# Altium PCB PCB1.PcbDoc (part 3 of 3)
Units mm, origin at the board's own origin, x right, y up, seen from the top; angles counter-clockwise.
Board outline 15.82 x 56.9 mm, 4 copper layers (Top Layer, Layer 1, Layer 2, Bottom Layer), stack 0.576 mm thick; 45 components, 31 nets, 148 pads, 202 vias.
Unrouted connection lines stored in the file: 3.
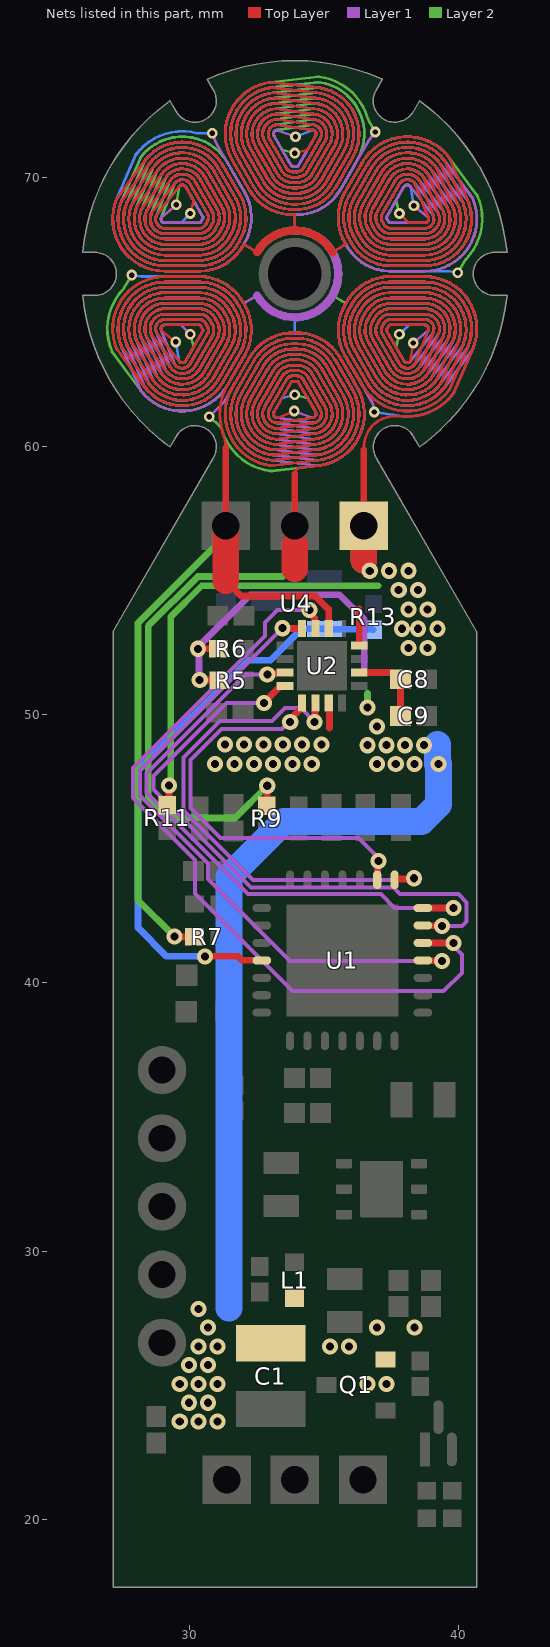
[diagram p5: the nets of this part, all layers, seen from the top]

## Via types
v1: diameter 0.6, hole 0.3, Top Layer to Bottom Layer, tented both sides, 160 vias
v2: diameter 0.5, hole 0.2, Top Layer to Bottom Layer, tented bottom, 20 vias
v3: diameter 0.4, hole 0.2, Top Layer to Bottom Layer, tented both sides, 18 vias
v4: diameter 0.5, hole 0.3, Top Layer to Bottom Layer, tented bottom, 4 vias

## Nets (pads, with @x,y where several pads share a name; then routed paths per layer and width w, separated by ;. In a path a pad name is that pad's centre, name@x,y a point inside that pad or via, vN(x,y) a via of type N, cw(c..) or ccw(c..) an arc to the next point about the centre after c; other vN are vias at no path point) (continued)
NetR7_2: (continued)
  Layer 2 w0.1: 27.093,63.528 27.106,63.509 ; 27.122,63.476 cw(c29.07,64.375) 27.106,63.509 ; v3(27.833,66.376) 27.541,65.881 ccw(c29.07,64.375) 27.106,63.509 ; v3(29.495,68.998) 29.599,69.674 ; 29.603,69.679 cw(c29.718,69.589) 29.844,69.662 30.482,68.556 cw(c30.419,68.52) 30.482,68.483 ; v3(30.012,64.171) 30.14,63.693 29.844,63.18 cw(c29.718,63.253) 29.603,63.163 29.595,63.174 28.757,64.228 cw(c29.07,64.375) 29.07,64.721 30.346,64.721 cw(c30.346,64.448) 30.578,64.592 cw(c30.346,64.448) 30.591,64.568 ; 30.41,68.358 cw(c30.346,68.394) 30.346,68.321 29.07,68.321 cw(c29.07,68.467) 28.934,68.521 28.939,68.534 29.434,69.786 cw(c29.718,69.589) 30.017,69.762 30.655,68.656 cw(c30.419,68.52) 30.66,68.392 ; 30.413,68.365 cw(c30.346,68.394) 30.41,68.359 30.445,68.421 30.482,68.483 ; 30.477,68.476 ccw(c30.419,68.52) 30.482,68.483 ; 30.578,64.592 ccw(c33.909,66.421) 30.618,64.521 ccw(c33.909,66.421) 30.66,64.45 ; 30.591,68.274 cw(c30.346,68.394) 30.578,68.25 ; 30.645,64.474 cw(c30.419,64.322) 30.66,64.45 ; 30.645,68.368 ccw(c30.419,68.52) 30.66,68.392 ; v3@30.704,61.061 cw(c30.184,59.969) 31.193,60.636 ccw(c33.261,61.207) 33.029,59.074 ; 30.751,64.693 ccw(c33.909,66.421) 30.791,64.621 ccw(c33.909,66.421) 30.833,64.55 ; 30.768,64.661 ccw(c30.346,64.448) 30.751,64.693 ccw(c30.346,64.448) 30.346,64.921 29.113,64.921 ccw(c29.07,64.375) 28.583,64.123 29.434,63.056 ccw(c29.718,63.253) 30.017,63.08 30.655,64.186 ccw(c30.419,64.322) 30.66,64.45 ; 30.768,68.181 cw(c30.346,68.394) 30.751,68.149 ; 30.815,64.581 cw(c30.419,64.322) 30.833,64.55 ; 30.815,68.261 ccw(c30.419,68.52) 30.833,68.292 ; 30.945,64.756 ccw(c30.346,64.448) 30.925,64.792 ; 30.945,68.086 cw(c30.346,68.394) 30.925,68.05 ; 30.985,64.686 cw(c30.419,64.322) 31.006,64.651 cw(c30.419,64.322) 31.002,63.986 30.364,62.88 cw(c29.718,63.253) 29.095,62.842 28.224,63.952 cw(c29.07,64.375) 29.063,65.321 30.346,65.321 cw(c30.346,64.448) 31.121,64.851 ; 30.985,68.156 ccw(c30.419,68.52) 31.006,68.191 ; 31.006,64.651 cw(c33.909,66.421) 30.965,64.721 cw(c33.909,66.421) 30.925,64.792 ; 31.099,64.891 ccw(c33.909,66.421) 31.138,64.821 ccw(c33.909,66.421) 31.179,64.752 ; 31.099,67.951 cw(c33.909,66.421) 31.138,68.021 cw(c33.909,66.421) 31.179,68.09 ; 31.121,67.991 cw(c30.346,68.394) 30.346,67.521 29.063,67.521 cw(c29.07,68.467) 28.224,68.89 28.761,70.219 cw(c29.718,69.589) 30.71,70.162 31.348,69.056 cw(c30.419,68.52) 31.351,67.988 ; 31.155,64.791 cw(c30.419,64.322) 31.175,63.886 30.533,62.774 cw(c29.718,63.253) 28.928,62.732 28.045,63.862 cw(c29.07,64.375) 29.07,65.521 30.346,65.521 cw(c30.346,64.448) 31.273,64.989 ; 31.155,68.051 ccw(c30.419,68.52) 31.175,68.956 30.533,70.068 ccw(c29.718,69.589) 28.928,70.11 28.403,68.801 ccw(c29.07,68.467) 29.07,67.721 30.346,67.721 ccw(c30.346,68.394) 30.925,68.05 ; 32.044,65.254 cw(c33.909,66.421) 32.004,65.321 ; 32.463,67.256 32.004,67.521 ccw(c30.419,68.52) 32.06,69.424 31.823,69.834 31.403,70.562 ccw(c29.718,69.589) 28.16,70.756 27.466,69.156 ccw(c29.07,68.467) 29.07,66.721 30.389,66.721 ccw(c30.346,68.394) 31.831,67.621 ccw(c30.419,68.52) 31.889,69.319 31.23,70.462 ccw(c29.718,69.589) 28.319,70.634 27.659,69.098 ccw(c29.07,68.467) 29.07,66.921 30.394,66.921 ccw(c30.346,68.394) 31.612,67.64 ; 33.006,59.071 33.029,59.074 ; 33.055,73.369 ccw(c33.261,71.635) 31.749,70.762 32.409,69.619 ccw(c33.836,70.493) 33.909,68.821 ccw(c33.982,70.493) 35.409,69.619 36.069,70.762 ccw(c34.557,71.635) 34.762,73.369 33.102,73.172 ccw(c33.261,71.635) 31.923,70.862 32.584,69.715 ccw(c33.836,70.493) 33.816,69.019 ; 33.056,59.077 34.789,59.275 ; 33.056,73.369 34.789,73.567 cw(c34.557,71.635) 36.242,70.662 35.822,69.934 35.585,69.524 cw(c33.982,70.493) 33.909,68.621 ; 33.066,59.07 cw(c33.261,61.207) 33.029,59.074 ; 33.829,63.222 ccw(c33.909,66.421) 33.909,63.221 ccw(c33.909,66.421) 33.989,63.222 ; 33.829,69.62 cw(c33.909,66.421) 33.909,69.621 cw(c33.909,66.421) 33.989,69.62 ; 33.83,68.62 cw(c33.909,66.421) 33.909,68.621 ; 33.855,62.621 ccw(c33.836,62.349) 33.827,62.622 ; 33.855,70.221 cw(c33.836,70.493) 33.827,70.22 ; 33.863,62.821 ccw(c33.836,62.349) 33.827,62.822 ; 33.863,70.021 cw(c33.836,70.493) 33.827,70.02 ; 33.869,63.021 ccw(c33.836,62.349) 33.827,63.022 ; 33.869,69.821 cw(c33.836,70.493) 33.827,69.82 ; 33.875,63.221 ccw(c33.836,62.349) 33.08,62.786 32.439,61.674 ccw(c33.261,61.207) 33.205,60.263 34.601,60.463 ccw(c34.557,61.207) 35.203,61.58 34.565,62.686 ccw(c33.982,62.349) 33.991,63.022 ; 33.875,69.621 cw(c33.836,70.493) 33.08,70.056 32.439,71.168 cw(c33.261,71.635) 33.205,72.579 34.624,72.779 cw(c34.557,71.635) 35.549,71.062 34.911,69.956 cw(c33.982,70.493) 33.987,69.42 ; v3(33.909,61.921) 34.387,61.793 34.683,61.28 cw(c34.557,61.207) 34.577,61.063 34.564,61.061 33.232,60.863 cw(c33.261,61.207) 32.962,61.38 33.6,62.486 cw(c33.836,62.349) 33.827,62.622 ; v3(33.909,70.921) 33.431,71.049 33.135,71.562 cw(c33.261,71.635) 33.241,71.779 33.254,71.781 34.586,71.979 cw(c34.557,71.635) 34.856,71.462 34.218,70.356 cw(c33.982,70.493) 33.991,70.22 ; 33.943,63.221 cw(c33.982,62.349) 34.738,62.786 35.379,61.674 cw(c34.557,61.207) 34.613,60.263 33.194,60.063 cw(c33.261,61.207) 32.269,61.78 32.907,62.886 cw(c33.836,62.349) 33.831,63.422 ; 33.943,69.621 ccw(c33.982,70.493) 34.738,70.056 35.379,71.168 ccw(c34.557,71.635) 34.613,72.579 33.217,72.379 ccw(c33.261,71.635) 32.615,71.262 33.253,70.156 ccw(c33.836,70.493) 33.827,69.82 ; 33.949,63.021 cw(c33.982,62.349) 33.991,63.022 ; 33.949,69.821 ccw(c33.982,70.493) 33.991,69.82 ; 33.955,62.821 cw(c33.982,62.349) 33.991,62.822 ; 33.955,70.021 ccw(c33.982,70.493) 33.991,70.02 ; 33.963,62.621 cw(c33.982,62.349) 33.991,62.622 ; 33.963,70.221 ccw(c33.982,70.493) 33.991,70.22 ; 33.988,64.222 cw(c33.909,66.421) 33.909,64.221 ; 34.752,73.772 cw(c34.557,71.635) 34.789,73.768 ; 34.762,59.473 33.029,59.275 cw(c33.261,61.207) 31.576,62.18 31.996,62.908 32.233,63.318 cw(c33.836,62.349) 33.909,64.221 ; 34.762,73.765 33.029,73.567 ; 34.763,59.473 ccw(c34.557,61.207) 36.069,62.08 35.409,63.223 ccw(c33.982,62.349) 33.909,64.021 ccw(c33.836,62.349) 32.409,63.223 31.749,62.08 ccw(c33.261,61.207) 33.056,59.473 34.716,59.67 ccw(c34.557,61.207) 35.895,61.98 35.234,63.127 ccw(c33.982,62.349) 34.002,63.823 ; 34.812,73.771 34.789,73.768 ; 35.355,65.586 35.814,65.321 cw(c37.472,64.448) 37.434,66.321 38.748,66.321 cw(c38.748,64.375) 40.537,63.61 39.499,62.208 cw(c38.1,63.253) 36.588,62.38 35.929,63.523 cw(c37.399,64.322) 35.987,65.221 cw(c37.472,64.448) 37.429,66.121 38.748,66.121 cw(c38.748,64.375) 40.352,63.686 39.352,62.346 cw(c38.1,63.253) 36.762,62.48 36.1,63.627 cw(c37.399,64.322) 36.113,65.041 ; 35.774,67.588 cw(c33.909,66.421) 35.814,67.521 ; 36.639,64.752 ccw(c33.909,66.421) 36.68,64.821 ccw(c33.909,66.421) 36.719,64.891 ; 36.639,68.09 cw(c33.909,66.421) 36.68,68.021 cw(c33.909,66.421) 36.719,67.951 ; 36.663,64.791 ccw(c37.399,64.322) 36.643,63.886 37.285,62.774 ccw(c38.1,63.253) 38.89,62.732 39.773,63.862 ccw(c38.748,64.375) 38.748,65.521 37.472,65.521 ccw(c37.472,64.448) 36.545,64.989 ; 36.663,68.051 cw(c37.399,68.52) 36.643,68.956 37.285,70.068 cw(c38.1,69.589) 38.89,70.11 39.773,68.98 cw(c38.748,68.467) 38.748,67.321 37.472,67.321 cw(c37.472,68.394) 36.545,67.853 ; 36.697,64.851 cw(c37.472,64.448) 37.472,65.321 38.755,65.321 cw(c38.748,64.375) 39.594,63.952 38.723,62.842 cw(c38.1,63.253) 37.454,62.88 36.816,63.986 cw(c37.399,64.322) 36.812,64.651 cw(c37.399,64.322) 36.833,64.686 ; 36.697,67.991 ccw(c37.472,68.394) 37.472,67.521 38.755,67.521 ccw(c38.748,68.467) 39.594,68.89 38.723,70 ccw(c38.1,69.589) 37.454,69.962 36.816,68.856 ccw(c37.399,68.52) 36.812,68.191 ; 36.812,64.651 ccw(c33.909,66.421) 36.853,64.721 ccw(c33.909,66.421) 36.893,64.792 ; 36.833,68.156 cw(c37.399,68.52) 36.812,68.191 ; 36.873,64.756 cw(c37.472,64.448) 36.893,64.792 ; 36.873,68.086 ccw(c37.472,68.394) 36.893,68.05 ; v3(36.908,71.706) 36.625,72.206 ccw(c34.557,71.635) 34.789,73.768 ; 37.003,64.581 ccw(c37.399,64.322) 36.985,64.55 ; 37.003,68.261 cw(c37.399,68.52) 36.985,68.292 ; 37.05,64.661 cw(c37.472,64.448) 37.067,64.693 cw(c37.472,64.448) 37.472,64.921 38.705,64.921 cw(c38.748,64.375) 39.235,64.123 38.384,63.056 cw(c38.1,63.253) 37.801,63.08 37.163,64.186 cw(c37.399,64.322) 37.158,64.45 ; 37.05,68.181 ccw(c37.472,68.394) 37.067,68.149 ; 37.067,64.693 cw(c33.909,66.421) 37.027,64.621 cw(c33.909,66.421) 36.985,64.55 ; 37.173,64.474 ccw(c37.399,64.322) 37.158,64.45 ; 37.173,68.368 cw(c37.399,68.52) 37.158,68.392 ; 37.227,64.568 cw(c37.472,64.448) 37.24,64.592 cw(c37.472,64.448) 37.472,64.721 38.748,64.721 cw(c38.748,64.375) 39.061,64.228 38.223,63.174 38.215,63.163 cw(c38.1,63.253) 37.974,63.18 37.678,63.693 v3(37.806,64.171) ; 37.227,68.274 ccw(c37.472,68.394) 37.24,68.25 ccw(c37.472,68.394) 37.472,68.121 38.748,68.121 ccw(c38.748,68.467) 39.061,68.614 38.223,69.668 38.215,69.679 ccw(c38.1,69.589) 37.974,69.662 37.678,69.149 v3(37.806,68.671) ; 37.24,64.592 cw(c33.909,66.421) 37.2,64.521 cw(c33.909,66.421) 37.158,64.45 ; 37.24,68.25 ccw(c33.909,66.421) 37.2,68.321 ccw(c33.909,66.421) 37.158,68.392 ; 39.499,70.634 40.537,69.232 cw(c38.748,68.467) 38.748,66.521 37.434,66.521 cw(c37.472,68.394) 35.814,67.521 ; 39.499,70.634 ccw(c38.1,69.589) 36.588,70.462 35.929,69.319 ccw(c37.399,68.52) 35.987,67.621 ccw(c37.472,68.394) 37.429,66.721 38.748,66.721 ccw(c38.748,68.467) 40.352,69.156 39.352,70.496 ccw(c38.1,69.589) 36.762,70.362 36.1,69.215 ccw(c37.399,68.52) 36.113,67.801 ; v3(39.985,66.466) 40.277,66.961 ccw(c38.748,68.467) 40.712,69.333 ; 40.696,69.366 cw(c38.748,68.467) 40.712,69.333 ; 40.725,69.314 40.712,69.333 ; 27.106,63.509 28.16,62.086 ccw(c29.718,63.253) 31.403,62.28 31.823,63.008 32.06,63.418 ccw(c30.419,64.322) 32.004,65.321 ; 30.578,68.25 cw(c33.909,66.421) 30.618,68.321 cw(c33.909,66.421) 30.66,68.392 ; 30.578,68.25 cw(c30.346,68.394) 30.346,68.121 29.07,68.121 cw(c29.07,68.467) 28.757,68.614 29.256,69.884 cw(c29.718,69.589) 30.212,69.824 30.829,68.756 cw(c30.419,68.52) 30.833,68.292 ; 30.751,68.149 cw(c33.909,66.421) 30.791,68.221 cw(c33.909,66.421) 30.833,68.292 ; 30.751,68.149 cw(c30.346,68.394) 30.346,67.921 29.113,67.921 cw(c29.07,68.467) 28.583,68.719 29.095,70 cw(c29.718,69.589) 30.364,69.962 31.002,68.856 cw(c30.419,68.52) 31.006,68.191 ; 30.833,64.55 cw(c30.419,64.322) 30.829,64.086 30.212,63.018 cw(c29.718,63.253) 29.256,62.958 28.403,64.041 cw(c29.07,64.375) 29.07,65.121 30.346,65.121 cw(c30.346,64.448) 30.925,64.792 ; 30.925,68.05 cw(c33.909,66.421) 30.965,68.121 cw(c33.909,66.421) 31.006,68.191 ; 31.273,64.989 ccw(c33.909,66.421) 31.297,64.946 ; 31.273,64.989 cw(c30.346,64.448) 31.297,64.946 ; 31.273,67.853 ccw(c30.346,68.394) 31.297,67.896 ; 31.273,67.853 cw(c33.909,66.421) 31.297,67.896 ; 31.273,67.853 cw(c30.346,68.394) 30.346,67.321 29.07,67.321 cw(c29.07,68.467) 28.045,68.98 28.611,70.355 cw(c29.718,69.589) 30.883,70.262 31.547,69.112 cw(c30.419,68.52) 31.536,67.907 ccw(c33.909,66.421) 31.484,67.821 cw(c30.346,68.394) 30.398,67.121 29.07,67.121 cw(c29.07,68.467) 27.853,69.042 28.466,70.496 cw(c29.718,69.589) 31.056,70.362 31.718,69.215 cw(c30.419,68.52) 31.705,67.801 ccw(c33.909,66.421) 31.657,67.721 ; 31.297,64.946 ccw(c33.909,66.421) 31.311,64.921 ccw(c33.909,66.421) 31.326,64.896 ; 31.297,67.896 cw(c33.909,66.421) 31.311,67.921 cw(c33.909,66.421) 31.326,67.946 ; 31.326,64.896 ccw(c33.909,66.421) 31.351,64.854 ; 31.326,64.896 cw(c30.419,64.322) 31.351,64.854 ; 31.326,67.946 ccw(c30.419,68.52) 31.351,67.988 ; 31.326,67.946 cw(c33.909,66.421) 31.351,67.988 ; 31.351,64.854 cw(c30.419,64.322) 31.348,63.786 30.71,62.68 cw(c29.718,63.253) 28.761,62.623 27.853,63.8 cw(c29.07,64.375) 29.07,65.721 30.398,65.721 cw(c30.346,64.448) 31.436,65.109 ccw(c33.909,66.421) 31.484,65.021 cw(c30.419,64.322) 31.547,63.73 30.883,62.58 cw(c29.718,63.253) 28.611,62.487 27.659,63.744 cw(c29.07,64.375) 29.07,65.921 30.394,65.921 cw(c30.346,64.448) 31.612,65.202 ccw(c33.909,66.421) 31.657,65.121 ; 31.612,67.64 ccw(c30.346,68.394) 31.657,67.721 ; 31.612,67.64 cw(c33.909,66.421) 31.657,67.721 ; 31.657,65.121 ccw(c33.909,66.421) 31.705,65.041 ; 31.657,65.121 cw(c30.419,64.322) 31.705,65.041 ; 31.705,65.041 cw(c30.419,64.322) 31.718,63.627 31.056,62.48 cw(c29.718,63.253) 28.466,62.346 27.466,63.686 cw(c29.07,64.375) 29.07,66.121 30.389,66.121 cw(c30.346,64.448) 31.831,65.221 cw(c30.419,64.322) 31.889,63.523 31.23,62.38 cw(c29.718,63.253) 28.319,62.208 27.281,63.61 cw(c29.07,64.375) 29.07,66.321 30.384,66.321 cw(c30.346,64.448) 32.004,65.321 ; 33.029,59.074 34.789,59.275 ; 33.029,73.567 ccw(c33.261,71.635) 31.576,70.662 31.996,69.934 32.233,69.524 ccw(c33.836,70.493) 33.909,68.621 ; 33.029,73.567 34.789,73.768 ; 33.816,69.019 cw(c33.909,66.421) 33.909,69.021 ; 33.816,69.019 ccw(c33.836,70.493) 33.909,69.021 ; 33.827,62.622 ccw(c33.909,66.421) 33.909,62.621 ccw(c33.909,66.421) 33.991,62.622 ; 33.827,62.822 ccw(c33.909,66.421) 33.909,62.821 ccw(c33.909,66.421) 33.991,62.822 ; 33.827,62.822 ccw(c33.836,62.349) 33.427,62.586 32.81,61.518 ccw(c33.261,61.207) 33.236,60.66 34.586,60.863 ccw(c34.557,61.207) 34.856,61.38 34.218,62.486 ccw(c33.982,62.349) 33.991,62.622 ; 33.827,63.022 ccw(c33.909,66.421) 33.909,63.021 ccw(c33.909,66.421) 33.991,63.022 ; 33.827,63.022 ccw(c33.836,62.349) 33.253,62.686 32.615,61.58 ccw(c33.261,61.207) 33.217,60.463 34.582,60.66 ccw(c34.557,61.207) 35.008,61.518 34.391,62.586 ccw(c33.982,62.349) 33.991,62.822 ; 33.827,69.82 cw(c33.909,66.421) 33.909,69.821 cw(c33.909,66.421) 33.991,69.82 ; 33.827,70.02 cw(c33.836,70.493) 33.427,70.256 32.81,71.324 cw(c33.261,71.635) 33.236,72.182 34.601,72.379 cw(c34.557,71.635) 35.203,71.262 34.565,70.156 cw(c33.982,70.493) 33.991,69.82 ; 33.827,70.02 cw(c33.909,66.421) 33.909,70.021 cw(c33.909,66.421) 33.991,70.02 ; 33.827,70.22 cw(c33.909,66.421) 33.909,70.221 cw(c33.909,66.421) 33.991,70.22 ; 33.827,70.22 cw(c33.836,70.493) 33.6,70.356 32.962,71.462 cw(c33.261,71.635) 33.232,71.979 34.582,72.182 cw(c34.557,71.635) 35.008,71.324 34.391,70.256 cw(c33.982,70.493) 33.991,70.02 ; 33.831,63.422 cw(c33.836,62.349) 33.88,63.421 ; 33.831,63.422 ccw(c33.909,66.421) 33.88,63.421 ; 33.831,69.42 ccw(c33.836,70.493) 33.88,69.421 ; 33.831,69.42 cw(c33.836,70.493) 32.907,69.956 32.269,71.062 cw(c33.261,71.635) 33.194,72.779 34.667,72.976 cw(c34.557,71.635) 35.722,70.962 35.058,69.812 cw(c33.982,70.493) 34.009,69.219 ccw(c33.909,66.421) 33.909,69.221 cw(c33.836,70.493) 32.76,69.812 32.096,70.962 cw(c33.261,71.635) 33.151,72.976 34.716,73.172 cw(c34.557,71.635) 35.895,70.862 35.234,69.715 cw(c33.982,70.493) 34.002,69.019 ccw(c33.909,66.421) 33.909,69.021 ; 33.831,69.42 cw(c33.909,66.421) 33.88,69.421 ; 33.88,63.421 ccw(c33.909,66.421) 33.909,63.421 ccw(c33.909,66.421) 33.938,63.421 ; 33.88,69.421 cw(c33.909,66.421) 33.909,69.421 cw(c33.909,66.421) 33.938,69.421 ; 33.909,63.821 cw(c33.982,62.349) 34.002,63.823 ; 33.909,63.821 ccw(c33.909,66.421) 34.002,63.823 ; 33.909,63.821 cw(c33.909,66.421) 33.816,63.823 ccw(c33.836,62.349) 32.584,63.127 31.923,61.98 ccw(c33.261,61.207) 33.102,59.67 34.667,59.866 ccw(c34.557,61.207) 35.722,61.88 35.058,63.03 ccw(c33.982,62.349) 33.909,63.621 cw(c33.909,66.421) 33.809,63.623 ccw(c33.836,62.349) 32.76,63.03 32.096,61.88 ccw(c33.261,61.207) 33.151,59.866 34.624,60.063 ccw(c34.557,61.207) 35.549,61.78 34.911,62.886 ccw(c33.982,62.349) 33.987,63.422 ; 33.909,64.221 cw(c33.982,62.349) 35.585,63.318 35.822,62.908 36.242,62.18 cw(c34.557,61.207) 34.789,59.275 ; 33.938,63.421 cw(c33.982,62.349) 33.987,63.422 ; 33.938,63.421 ccw(c33.909,66.421) 33.987,63.422 ; 33.938,69.421 cw(c33.909,66.421) 33.987,69.42 ; 33.938,69.421 ccw(c33.982,70.493) 33.987,69.42 ; 35.814,67.521 cw(c37.399,68.52) 35.758,69.424 35.995,69.834 36.415,70.562 cw(c38.1,69.589) 39.658,70.756 40.712,69.333 ; 36.113,65.041 ccw(c33.909,66.421) 36.161,65.121 ; 36.113,65.041 cw(c37.399,64.322) 36.161,65.121 ; 36.113,67.801 ccw(c37.399,68.52) 36.161,67.721 ; 36.113,67.801 cw(c33.909,66.421) 36.161,67.721 ; 36.161,65.121 ccw(c33.909,66.421) 36.206,65.202 cw(c37.472,64.448) 37.424,65.921 38.748,65.921 cw(c38.748,64.375) 40.159,63.744 39.207,62.487 cw(c38.1,63.253) 36.935,62.58 36.271,63.73 cw(c37.399,64.322) 36.334,65.021 ccw(c33.909,66.421) 36.382,65.109 cw(c37.472,64.448) 37.42,65.721 38.748,65.721 cw(c38.748,64.375) 39.965,63.8 39.057,62.623 cw(c38.1,63.253) 37.108,62.68 36.47,63.786 cw(c37.399,64.322) 36.467,64.854 ; 36.161,67.721 cw(c33.909,66.421) 36.206,67.64 ccw(c37.472,68.394) 37.424,66.921 38.748,66.921 ccw(c38.748,68.467) 40.159,69.098 39.207,70.355 ccw(c38.1,69.589) 36.935,70.262 36.271,69.112 ccw(c37.399,68.52) 36.334,67.821 cw(c33.909,66.421) 36.382,67.733 ccw(c37.472,68.394) 37.42,67.121 38.748,67.121 ccw(c38.748,68.467) 39.965,69.042 39.057,70.219 ccw(c38.1,69.589) 37.108,70.162 36.47,69.056 ccw(c37.399,68.52) 36.467,67.988 ; 36.467,64.854 cw(c37.399,64.322) 36.492,64.896 ; 36.467,64.854 ccw(c33.909,66.421) 36.492,64.896 ; 36.467,67.988 ccw(c37.399,68.52) 36.492,67.946 ; 36.467,67.988 cw(c33.909,66.421) 36.492,67.946 ; 36.492,64.896 ccw(c33.909,66.421) 36.507,64.921 ccw(c33.909,66.421) 36.521,64.946 ; 36.492,67.946 cw(c33.909,66.421) 36.507,67.921 cw(c33.909,66.421) 36.521,67.896 ; 36.521,64.946 ccw(c33.909,66.421) 36.545,64.989 ; 36.521,64.946 cw(c37.472,64.448) 36.545,64.989 ; 36.521,67.896 ccw(c37.472,68.394) 36.545,67.853 ; 36.521,67.896 cw(c33.909,66.421) 36.545,67.853 ; 36.812,68.191 cw(c33.909,66.421) 36.853,68.121 cw(c33.909,66.421) 36.893,68.05 ; 36.893,64.792 cw(c37.472,64.448) 37.472,65.121 38.748,65.121 cw(c38.748,64.375) 39.415,64.041 38.562,62.958 cw(c38.1,63.253) 37.606,63.018 36.989,64.086 cw(c37.399,64.322) 36.985,64.55 ; 36.893,68.05 ccw(c37.472,68.394) 37.472,67.721 38.748,67.721 ccw(c38.748,68.467) 39.415,68.801 38.562,69.884 ccw(c38.1,69.589) 37.606,69.824 36.989,68.756 ccw(c37.399,68.52) 36.985,68.292 ; 36.985,68.292 cw(c33.909,66.421) 37.027,68.221 cw(c33.909,66.421) 37.067,68.149 ; 37.067,68.149 ccw(c37.472,68.394) 37.472,67.921 38.705,67.921 ccw(c38.748,68.467) 39.235,68.719 38.384,69.786 ccw(c38.1,69.589) 37.801,69.762 37.163,68.656 ccw(c37.399,68.52) 37.158,68.392
  Layer 2 w0.25: v1(29.422,41.727) 28.067,43.082 28.067,53.415 31.339,56.687 31.339,57.031
  Layer 2 w0.3: 32.506,67.231 cw(c33.909,66.421) 35.312,65.611
  Layer 2 w1: 36.479,55.757 pad.@36.479,57.031
  Bottom Layer w0.1: 27.281,69.232 ccw(c29.07,68.467) 29.07,66.521 30.384,66.521 ccw(c30.346,68.394) 32.004,67.521 ; 27.281,69.232 27.986,70.856 ; v3(27.833,66.376) 28.23,66.321 30.384,66.321 cw(c30.346,64.448) 32.004,65.321 ; 27.965,70.827 cw(c29.718,69.589) 27.986,70.856 ; 27.995,70.878 27.986,70.856 ; v3(29.47,63.887) 29.603,63.163 ccw(c29.718,63.253) 29.844,63.18 30.482,64.286 ccw(c30.419,64.322) 30.482,64.359 ; v3(30.012,68.671) 29.662,68.321 29.07,68.321 cw(c29.07,68.467) 28.934,68.521 28.939,68.534 29.434,69.786 cw(c29.718,69.589) 30.017,69.762 30.655,68.656 cw(c30.419,68.52) 30.66,68.392 ; 30.413,64.477 ccw(c30.346,64.448) 30.41,64.484 ; 30.477,64.366 cw(c30.419,64.322) 30.482,64.359 ; 30.578,64.592 ccw(c33.909,66.421) 30.618,64.521 ccw(c33.909,66.421) 30.66,64.45 ; 30.591,64.568 ccw(c30.346,64.448) 30.578,64.592 ccw(c30.346,64.448) 30.346,64.721 29.07,64.721 ccw(c29.07,64.375) 28.757,64.228 29.256,62.958 ccw(c29.718,63.253) 30.212,63.018 30.829,64.086 ccw(c30.419,64.322) 30.833,64.55 ; 30.591,68.274 cw(c30.346,68.394) 30.578,68.25 ; 30.645,64.474 cw(c30.419,64.322) 30.66,64.45 ; 30.645,68.368 ccw(c30.419,68.52) 30.66,68.392 ; 30.751,64.693 ccw(c33.909,66.421) 30.791,64.621 ccw(c33.909,66.421) 30.833,64.55 ; 30.768,64.661 ccw(c30.346,64.448) 30.751,64.693 ccw(c30.346,64.448) 30.346,64.921 29.113,64.921 ccw(c29.07,64.375) 28.583,64.123 29.095,62.842 ccw(c29.718,63.253) 30.364,62.88 31.002,63.986 ccw(c30.419,64.322) 31.006,64.651 ccw(c30.419,64.322) 30.985,64.686 ; 30.768,68.181 cw(c30.346,68.394) 30.751,68.149 ; 30.815,64.581 cw(c30.419,64.322) 30.833,64.55 ; 30.815,68.261 ccw(c30.419,68.52) 30.833,68.292 ; v3(30.832,71.661) 30.257,71.666 ccw(c29.718,69.589) 27.986,70.856 ; 30.945,64.756 ccw(c30.346,64.448) 30.925,64.792 ; 30.945,68.086 cw(c30.346,68.394) 30.925,68.05 ; 30.985,68.156 ccw(c30.419,68.52) 31.006,68.191 ; 31.006,64.651 cw(c33.909,66.421) 30.965,64.721 cw(c33.909,66.421) 30.925,64.792 ; 31.099,64.891 ccw(c33.909,66.421) 31.138,64.821 ccw(c33.909,66.421) 31.179,64.752 ; 31.099,67.951 cw(c33.909,66.421) 31.138,68.021 cw(c33.909,66.421) 31.179,68.09 ; 31.121,64.851 ccw(c30.346,64.448) 30.346,65.321 29.063,65.321 ccw(c29.07,64.375) 28.224,63.952 28.761,62.623 ccw(c29.718,63.253) 30.71,62.68 31.348,63.786 ccw(c30.419,64.322) 31.351,64.854 ; 31.121,67.991 cw(c30.346,68.394) 30.346,67.521 29.063,67.521 cw(c29.07,68.467) 28.224,68.89 28.761,70.219 cw(c29.718,69.589) 30.71,70.162 31.348,69.056 cw(c30.419,68.52) 31.351,67.988 ; 31.155,64.791 cw(c30.419,64.322) 31.175,63.886 30.533,62.774 cw(c29.718,63.253) 28.928,62.732 28.403,64.041 cw(c29.07,64.375) 29.07,65.121 30.346,65.121 cw(c30.346,64.448) 30.925,64.792 ; 31.155,68.051 ccw(c30.419,68.52) 31.175,68.956 30.533,70.068 ccw(c29.718,69.589) 28.928,70.11 28.403,68.801 ccw(c29.07,68.467) 29.07,67.721 30.346,67.721 ccw(c30.346,68.394) 30.925,68.05 ; 31.966,65.39 ccw(c33.909,66.421) 32.004,65.321 ; 31.966,67.452 cw(c33.909,66.421) 32.004,67.521 ; 33.055,59.473 cw(c33.261,61.207) 31.749,62.08 32.409,63.223 cw(c33.836,62.349) 33.909,64.021 cw(c33.982,62.349) 35.409,63.223 36.069,62.08 cw(c34.557,61.207) 34.762,59.473 33.102,59.67 cw(c33.261,61.207) 31.923,61.98 32.584,63.127 cw(c33.836,62.349) 33.816,63.823 ; 33.055,73.369 ccw(c33.261,71.635) 31.749,70.762 32.409,69.619 ccw(c33.836,70.493) 33.909,68.821 ccw(c33.982,70.493) 35.409,69.619 36.069,70.762 ccw(c34.557,71.635) 34.762,73.369 33.102,73.172 ccw(c33.261,71.635) 31.923,70.862 32.584,69.715 ccw(c33.836,70.493) 33.816,69.019 ; 33.056,59.473 34.789,59.275 ccw(c34.557,61.207) 36.242,62.18 35.822,62.908 35.585,63.318 ccw(c33.982,62.349) 33.909,64.221 33.909,64.751 ; 33.056,73.369 34.789,73.567 cw(c34.557,71.635) 36.242,70.662 35.822,69.934 35.585,69.524 cw(c33.982,70.493) 33.909,68.621 33.909,68.091 ; 33.829,63.222 ccw(c33.909,66.421) 33.909,63.221 ccw(c33.909,66.421) 33.989,63.222 ; 33.829,69.62 cw(c33.909,66.421) 33.909,69.621 cw(c33.909,66.421) 33.989,69.62 ; 33.845,70.42 cw(c33.836,70.493) 33.838,70.42 ; 33.855,62.621 ccw(c33.836,62.349) 33.827,62.622 ; 33.855,70.221 cw(c33.836,70.493) 33.827,70.22 ; 33.863,62.821 ccw(c33.836,62.349) 33.827,62.822 ; 33.863,70.021 cw(c33.836,70.493) 33.827,70.02 ; 33.869,63.021 ccw(c33.836,62.349) 33.827,63.022 ; 33.869,69.821 cw(c33.836,70.493) 33.827,69.82 ; 33.875,63.221 ccw(c33.836,62.349) 33.08,62.786 32.439,61.674 ccw(c33.261,61.207) 33.205,60.263 34.624,60.063 ccw(c34.557,61.207) 35.549,61.78 34.911,62.886 ccw(c33.982,62.349) 33.987,63.422 ; 33.875,69.621 cw(c33.836,70.493) 33.08,70.056 32.439,71.168 cw(c33.261,71.635) 33.205,72.579 34.624,72.779 cw(c34.557,71.635) 35.549,71.062 34.911,69.956 cw(c33.982,70.493) 33.987,69.42 ; v3(33.909,61.921) 33.431,61.793 33.135,61.28 ccw(c33.261,61.207) 33.241,61.063 33.254,61.061 34.586,60.863 ccw(c34.557,61.207) 34.856,61.38 34.218,62.486 ccw(c33.982,62.349) 33.991,62.622 ; v3(33.934,71.532) 34.571,71.78 ; 33.943,63.221 cw(c33.982,62.349) 34.738,62.786 35.379,61.674 cw(c34.557,61.207) 34.613,60.263 33.217,60.463 cw(c33.261,61.207) 32.615,61.58 33.253,62.686 cw(c33.836,62.349) 33.827,63.022 ; 33.943,69.621 ccw(c33.982,70.493) 34.738,70.056 35.379,71.168 ccw(c34.557,71.635) 34.613,72.579 33.217,72.379 ccw(c33.261,71.635) 32.615,71.262 33.253,70.156 ccw(c33.836,70.493) 33.827,69.82 ; 33.949,63.021 cw(c33.982,62.349) 33.991,63.022 ; 33.949,69.821 ccw(c33.982,70.493) 33.991,69.82 ; 33.955,62.821 cw(c33.982,62.349) 33.991,62.822 ; 33.955,70.021 ccw(c33.982,70.493) 33.991,70.02 ; 33.963,62.621 cw(c33.982,62.349) 33.991,62.622 ; 33.963,70.221 ccw(c33.982,70.493) 33.991,70.22 ; 33.973,70.42 ccw(c33.982,70.493) 33.98,70.42 ; 34.577,71.779 cw(c34.557,71.635) 34.683,71.562 34.045,70.456 cw(c33.982,70.493) 33.981,70.42 ; 35.852,65.39 cw(c33.909,66.421) 35.814,65.321 ; 35.852,67.452 ccw(c33.909,66.421) 35.814,67.521 ; 36.639,64.752 ccw(c33.909,66.421) 36.68,64.821 ccw(c33.909,66.421) 36.719,64.891 ; 36.639,68.09 cw(c33.909,66.421) 36.68,68.021 cw(c33.909,66.421) 36.719,67.951 ; 36.663,64.791 ccw(c37.399,64.322) 36.643,63.886 37.285,62.774 ccw(c38.1,63.253) 38.89,62.732 39.415,64.041 ccw(c38.748,64.375) 38.748,65.121 37.472,65.121 ccw(c37.472,64.448) 36.893,64.792 ; 36.663,68.051 cw(c37.399,68.52) 36.643,68.956 37.285,70.068 cw(c38.1,69.589) 38.89,70.11 39.415,68.801 cw(c38.748,68.467) 38.748,67.721 37.472,67.721 cw(c37.472,68.394) 36.893,68.05 ; 36.697,64.851 cw(c37.472,64.448) 37.472,65.321 38.755,65.321 cw(c38.748,64.375) 39.594,63.952 39.057,62.623 cw(c38.1,63.253) 37.108,62.68 36.47,63.786 cw(c37.399,64.322) 36.467,64.854 ; 36.697,67.991 ccw(c37.472,68.394) 37.472,67.521 38.755,67.521 ccw(c38.748,68.467) 39.594,68.89 39.057,70.219 ccw(c38.1,69.589) 37.108,70.162 36.47,69.056 ccw(c37.399,68.52) 36.467,67.988 ; 36.812,64.651 ccw(c33.909,66.421) 36.853,64.721 ccw(c33.909,66.421) 36.893,64.792 ; 36.833,64.686 ccw(c37.399,64.322) 36.812,64.651 ccw(c37.399,64.322) 36.816,63.986 37.454,62.88 ccw(c38.1,63.253) 38.723,62.842 39.235,64.123 ccw(c38.748,64.375) 38.705,64.921 37.472,64.921 ccw(c37.472,64.448) 37.067,64.693 ccw(c37.472,64.448) 37.05,64.661 ; 36.833,68.156 cw(c37.399,68.52) 36.812,68.191 ; v3(36.87,61.276) 37.561,61.176 ccw(c38.1,63.253) 39.832,61.986 ; 36.873,64.756 cw(c37.472,64.448) 36.893,64.792 ; 36.873,68.086 ccw(c37.472,68.394) 36.893,68.05 ; 37.003,64.581 ccw(c37.399,64.322) 36.985,64.55 ; 37.003,68.261 cw(c37.399,68.52) 36.985,68.292 ; 37.05,68.181 ccw(c37.472,68.394) 37.067,68.149 ; 37.067,64.693 cw(c33.909,66.421) 37.027,64.621 cw(c33.909,66.421) 36.985,64.55 ; 37.173,64.474 ccw(c37.399,64.322) 37.158,64.45 ; 37.227,64.568 cw(c37.472,64.448) 37.24,64.592 cw(c37.472,64.448) 37.472,64.721 38.748,64.721 cw(c38.748,64.375) 39.061,64.228 38.562,62.958 cw(c38.1,63.253) 37.606,63.018 36.989,64.086 cw(c37.399,64.322) 36.985,64.55 ; 37.227,68.274 ccw(c37.472,68.394) 37.24,68.25 ccw(c37.472,68.394) 37.472,68.121 38.748,68.121 ccw(c38.748,68.467) 39.061,68.614 38.562,69.884 ccw(c38.1,69.589) 37.606,69.824 36.989,68.756 ccw(c37.399,68.52) 36.985,68.292 ; 37.24,64.592 cw(c33.909,66.421) 37.2,64.521 cw(c33.909,66.421) 37.158,64.45 ; 37.24,68.25 ccw(c33.909,66.421) 37.2,68.321 ccw(c33.909,66.421) 37.158,68.392 ; 37.341,68.476 cw(c37.399,68.52) 37.336,68.483 ; 37.405,68.365 ccw(c37.472,68.394) 37.408,68.358 ; v3(37.806,64.171) 38.156,64.521 38.748,64.521 cw(c38.748,64.375) 38.884,64.321 38.879,64.308 38.384,63.056 cw(c38.1,63.253) 37.801,63.08 37.163,64.186 cw(c37.399,64.322) 37.158,64.45 ; 38.215,69.679 ccw(c38.1,69.589) 37.974,69.662 37.336,68.556 ccw(c37.399,68.52) 37.336,68.483 ; 38.223,69.668 v3(38.348,68.955) ; 39.823,61.964 39.832,61.986 ; 39.853,62.015 cw(c38.1,63.253) 39.832,61.986 ; v3(39.985,66.466) 39.658,66.521 37.434,66.521 cw(c37.472,68.394) 35.814,67.521 ; 30.41,64.484 ccw(c30.346,64.448) 30.346,64.521 29.07,64.521 ccw(c29.07,64.375) 28.934,64.321 28.939,64.308 29.434,63.056 ccw(c29.718,63.253) 30.017,63.08 30.655,64.186 ccw(c30.419,64.322) 30.66,64.45 ; 30.41,64.484 30.445,64.421 30.482,64.359 ; 30.578,68.25 cw(c33.909,66.421) 30.618,68.321 cw(c33.909,66.421) 30.66,68.392 ; 30.578,68.25 cw(c30.346,68.394) 30.346,68.121 29.07,68.121 cw(c29.07,68.467) 28.757,68.614 29.256,69.884 cw(c29.718,69.589) 30.212,69.824 30.829,68.756 cw(c30.419,68.52) 30.833,68.292 ; 30.751,68.149 cw(c33.909,66.421) 30.791,68.221 cw(c33.909,66.421) 30.833,68.292 ; 30.751,68.149 cw(c30.346,68.394) 30.346,67.921 29.113,67.921 cw(c29.07,68.467) 28.583,68.719 29.095,70 cw(c29.718,69.589) 30.364,69.962 31.002,68.856 cw(c30.419,68.52) 31.006,68.191 ; 30.925,68.05 cw(c33.909,66.421) 30.965,68.121 cw(c33.909,66.421) 31.006,68.191 ; 31.273,64.989 ccw(c33.909,66.421) 31.297,64.946 ; 31.273,64.989 cw(c30.346,64.448) 31.297,64.946 ; 31.273,64.989 ccw(c30.346,64.448) 30.346,65.521 29.07,65.521 ccw(c29.07,64.375) 28.045,63.862 28.611,62.487 ccw(c29.718,63.253) 30.883,62.58 31.547,63.73 ccw(c30.419,64.322) 31.536,64.935 cw(c33.909,66.421) 31.484,65.021 ccw(c30.346,64.448) 30.398,65.721 29.07,65.721 ccw(c29.07,64.375) 27.853,63.8 28.466,62.346 ccw(c29.718,63.253) 31.056,62.48 31.718,63.627 ccw(c30.419,64.322) 31.705,65.041 cw(c33.909,66.421) 31.657,65.121 ; 31.273,67.853 ccw(c30.346,68.394) 31.297,67.896 ; 31.273,67.853 cw(c33.909,66.421) 31.297,67.896 ; 31.273,67.853 cw(c30.346,68.394) 30.346,67.321 29.07,67.321 cw(c29.07,68.467) 28.045,68.98 28.611,70.355 cw(c29.718,69.589) 30.883,70.262 31.547,69.112 cw(c30.419,68.52) 31.536,67.907 ccw(c33.909,66.421) 31.484,67.821 cw(c30.346,68.394) 30.398,67.121 29.07,67.121 cw(c29.07,68.467) 27.853,69.042 28.466,70.496 cw(c29.718,69.589) 31.056,70.362 31.718,69.215 cw(c30.419,68.52) 31.705,67.801 ccw(c33.909,66.421) 31.657,67.721 ; 31.297,64.946 ccw(c33.909,66.421) 31.311,64.921 ccw(c33.909,66.421) 31.326,64.896 ; 31.297,67.896 cw(c33.909,66.421) 31.311,67.921 cw(c33.909,66.421) 31.326,67.946 ; 31.326,64.896 ccw(c33.909,66.421) 31.351,64.854 ; 31.326,64.896 cw(c30.419,64.322) 31.351,64.854 ; 31.326,67.946 ccw(c30.419,68.52) 31.351,67.988 ; 31.326,67.946 cw(c33.909,66.421) 31.351,67.988 ; 31.612,65.202 ccw(c30.346,64.448) 30.394,65.921 29.07,65.921 ccw(c29.07,64.375) 27.659,63.744 28.319,62.208 ccw(c29.718,63.253) 31.23,62.38 31.889,63.523 ccw(c30.419,64.322) 31.831,65.221 ccw(c30.346,64.448) 30.389,66.121 29.07,66.121 ccw(c29.07,64.375) 27.466,63.686 28.16,62.086 ccw(c29.718,63.253) 31.403,62.28 31.823,63.008 32.06,63.418 ccw(c30.419,64.322) 32.004,65.321 ; 31.612,65.202 cw(c30.346,64.448) 31.657,65.121 ; 31.612,65.202 ccw(c33.909,66.421) 31.657,65.121 ; 31.612,67.64 cw(c33.909,66.421) 31.657,67.721 ; 31.612,67.64 ccw(c30.346,68.394) 31.657,67.721 ; 31.612,67.64 cw(c30.346,68.394) 30.394,66.921 29.07,66.921 cw(c29.07,68.467) 27.659,69.098 28.319,70.634 cw(c29.718,69.589) 31.23,70.462 31.889,69.319 cw(c30.419,68.52) 31.831,67.621 cw(c30.346,68.394) 30.389,66.721 29.07,66.721 cw(c29.07,68.467) 27.466,69.156 28.16,70.756 cw(c29.718,69.589) 31.403,70.562 31.823,69.834 32.06,69.424 cw(c30.419,68.52) 32.004,67.521 ; 33.816,63.823 cw(c33.836,62.349) 33.909,63.821 ; 33.816,63.823 ccw(c33.909,66.421) 33.909,63.821 ; 33.816,69.019 cw(c33.909,66.421) 33.909,69.021 ; 33.816,69.019 ccw(c33.836,70.493) 33.909,69.021 ; 33.827,62.622 ccw(c33.909,66.421) 33.909,62.621 ccw(c33.909,66.421) 33.991,62.622 ; 33.827,62.622 ccw(c33.836,62.349) 33.6,62.486 32.962,61.38 ccw(c33.261,61.207) 33.232,60.863 34.582,60.66 ccw(c34.557,61.207) 35.008,61.518 34.391,62.586 ccw(c33.982,62.349) 33.991,62.822 ; 33.827,62.822 ccw(c33.909,66.421) 33.909,62.821 ccw(c33.909,66.421) 33.991,62.822 ; 33.827,62.822 ccw(c33.836,62.349) 33.427,62.586 32.81,61.518 ccw(c33.261,61.207) 33.236,60.66 34.601,60.463 ccw(c34.557,61.207) 35.203,61.58 34.565,62.686 ccw(c33.982,62.349) 33.991,63.022 ; 33.827,63.022 ccw(c33.909,66.421) 33.909,63.021 ccw(c33.909,66.421) 33.991,63.022 ; 33.827,69.82 cw(c33.909,66.421) 33.909,69.821 cw(c33.909,66.421) 33.991,69.82 ; 33.827,70.02 cw(c33.836,70.493) 33.427,70.256 32.81,71.324 cw(c33.261,71.635) 33.236,72.182 34.601,72.379 cw(c34.557,71.635) 35.203,71.262 34.565,70.156 cw(c33.982,70.493) 33.991,69.82 ; 33.827,70.02 cw(c33.909,66.421) 33.909,70.021 cw(c33.909,66.421) 33.991,70.02 ; 33.827,70.22 cw(c33.909,66.421) 33.909,70.221 cw(c33.909,66.421) 33.991,70.22 ; 33.827,70.22 cw(c33.836,70.493) 33.6,70.356 32.962,71.462 cw(c33.261,71.635) 33.232,71.979 34.582,72.182 cw(c34.557,71.635) 35.008,71.324 34.391,70.256 cw(c33.982,70.493) 33.991,70.02 ; 33.831,63.422 cw(c33.836,62.349) 33.88,63.421 ; 33.831,63.422 ccw(c33.909,66.421) 33.88,63.421 ; 33.831,63.422 ccw(c33.836,62.349) 32.907,62.886 32.269,61.78 ccw(c33.261,61.207) 33.194,60.063 34.667,59.866 ccw(c34.557,61.207) 35.722,61.88 35.058,63.03 ccw(c33.982,62.349) 34.009,63.623 cw(c33.909,66.421) 33.909,63.621 ccw(c33.836,62.349) 32.76,63.03 32.096,61.88 ccw(c33.261,61.207) 33.151,59.866 34.716,59.67 ccw(c34.557,61.207) 35.895,61.98 35.234,63.127 ccw(c33.982,62.349) 34.002,63.823 cw(c33.909,66.421) 33.909,63.821 ; 33.831,69.42 ccw(c33.836,70.493) 33.88,69.421 ; 33.831,69.42 cw(c33.836,70.493) 32.907,69.956 32.269,71.062 cw(c33.261,71.635) 33.194,72.779 34.667,72.976 cw(c34.557,71.635) 35.722,70.962 35.058,69.812 cw(c33.982,70.493) 34.009,69.219 ccw(c33.909,66.421) 33.909,69.221 cw(c33.836,70.493) 32.76,69.812 32.096,70.962 cw(c33.261,71.635) 33.151,72.976 34.716,73.172 cw(c34.557,71.635) 35.895,70.862 35.234,69.715 cw(c33.982,70.493) 34.002,69.019 ccw(c33.909,66.421) 33.909,69.021 ; 33.831,69.42 cw(c33.909,66.421) 33.88,69.421 ; 33.837,70.42 cw(c33.836,70.493) 33.773,70.456 33.135,71.562 cw(c33.261,71.635) 33.241,71.779 33.254,71.781 34.586,71.979 cw(c34.557,71.635) 34.856,71.462 34.218,70.356 cw(c33.982,70.493) 33.991,70.22 ; 33.838,70.42 33.909,70.421 33.98,70.42 ; 33.88,63.421 ccw(c33.909,66.421) 33.909,63.421 ccw(c33.909,66.421) 33.938,63.421 ; 33.88,69.421 cw(c33.909,66.421) 33.909,69.421 cw(c33.909,66.421) 33.938,69.421 ; 33.938,63.421 cw(c33.982,62.349) 33.987,63.422 ; 33.938,63.421 ccw(c33.909,66.421) 33.987,63.422 ; 33.938,69.421 cw(c33.909,66.421) 33.987,69.42 ; 33.938,69.421 ccw(c33.982,70.493) 33.987,69.42 ; 35.814,65.321 cw(c37.472,64.448) 37.434,66.321 38.748,66.321 cw(c38.748,64.375) 40.537,63.61 39.832,61.986 ; 35.814,65.321 ccw(c37.399,64.322) 35.758,63.418 35.995,63.008 36.415,62.28 ccw(c38.1,63.253) 39.658,62.086 40.352,63.686 ccw(c38.748,64.375) 38.748,66.121 37.429,66.121 ccw(c37.472,64.448) 35.987,65.221 ccw(c37.399,64.322) 35.929,63.523 36.588,62.38 ccw(c38.1,63.253) 39.499,62.208 40.159,63.744 ccw(c38.748,64.375) 38.748,65.921 37.424,65.921 ccw(c37.472,64.448) 36.206,65.202 ; 35.814,67.521 cw(c37.399,68.52) 35.758,69.424 35.995,69.834 36.415,70.562 cw(c38.1,69.589) 39.658,70.756 40.352,69.156 cw(c38.748,68.467) 38.748,66.721 37.429,66.721 cw(c37.472,68.394) 35.987,67.621 cw(c37.399,68.52) 35.929,69.319 36.588,70.462 cw(c38.1,69.589) 39.499,70.634 40.159,69.098 cw(c38.748,68.467) 38.748,66.921 37.424,66.921 cw(c37.472,68.394) 36.206,67.64 ; 36.161,65.121 cw(c37.472,64.448) 36.206,65.202 ; 36.161,65.121 ccw(c33.909,66.421) 36.206,65.202 ; 36.161,65.121 cw(c33.909,66.421) 36.113,65.041 ccw(c37.399,64.322) 36.1,63.627 36.762,62.48 ccw(c38.1,63.253) 39.352,62.346 39.965,63.8 ccw(c38.748,64.375) 38.748,65.721 37.42,65.721 ccw(c37.472,64.448) 36.334,65.021 cw(c33.909,66.421) 36.282,64.935 ccw(c37.399,64.322) 36.271,63.73 36.935,62.58 ccw(c38.1,63.253) 39.207,62.487 39.773,63.862 ccw(c38.748,64.375) 38.748,65.521 37.472,65.521 ccw(c37.472,64.448) 36.545,64.989 ; 36.161,67.721 cw(c33.909,66.421) 36.206,67.64 ; 36.161,67.721 ccw(c37.472,68.394) 36.206,67.64 ; 36.161,67.721 ccw(c33.909,66.421) 36.113,67.801 cw(c37.399,68.52) 36.1,69.215 36.762,70.362 cw(c38.1,69.589) 39.352,70.496 39.965,69.042 cw(c38.748,68.467) 38.748,67.121 37.42,67.121 cw(c37.472,68.394) 36.334,67.821 ccw(c33.909,66.421) 36.282,67.907 cw(c37.399,68.52) 36.271,69.112 36.935,70.262 cw(c38.1,69.589) 39.207,70.355 39.773,68.98 cw(c38.748,68.467) 38.748,67.321 37.472,67.321 cw(c37.472,68.394) 36.545,67.853 ; 36.467,64.854 ccw(c33.909,66.421) 36.492,64.896 ; 36.467,64.854 cw(c37.399,64.322) 36.492,64.896 ; 36.467,67.988 ccw(c37.399,68.52) 36.492,67.946 ; 36.467,67.988 cw(c33.909,66.421) 36.492,67.946 ; 36.492,64.896 ccw(c33.909,66.421) 36.507,64.921 ccw(c33.909,66.421) 36.521,64.946 ; 36.492,67.946 cw(c33.909,66.421) 36.507,67.921 cw(c33.909,66.421) 36.521,67.896 ; 36.521,64.946 ccw(c33.909,66.421) 36.545,64.989 ; 36.521,64.946 cw(c37.472,64.448) 36.545,64.989 ; 36.521,67.896 ccw(c37.472,68.394) 36.545,67.853 ; 36.521,67.896 cw(c33.909,66.421) 36.545,67.853 ; 36.812,68.191 cw(c37.399,68.52) 36.816,68.856 37.454,69.962 cw(c38.1,69.589) 38.723,70 39.235,68.719 cw(c38.748,68.467) 38.705,67.921 37.472,67.921 cw(c37.472,68.394) 37.067,68.149 ; 36.812,68.191 cw(c33.909,66.421) 36.853,68.121 cw(c33.909,66.421) 36.893,68.05 ; 36.985,68.292 cw(c33.909,66.421) 37.027,68.221 cw(c33.909,66.421) 37.067,68.149 ; 37.158,68.392 ccw(c37.399,68.52) 37.173,68.368 cw(c37.399,68.52) 37.158,68.392 ; 37.158,68.392 cw(c37.399,68.52) 37.163,68.656 ; 37.158,68.392 cw(c37.399,68.52) 37.163,68.656 ; 37.163,68.656 37.801,69.762 cw(c38.1,69.589) 38.384,69.786 38.879,68.534 38.884,68.521 cw(c38.748,68.467) 38.748,68.321 37.472,68.321 cw(c37.472,68.394) 37.408,68.358 ; 37.336,68.483 37.373,68.421 37.408,68.358
  Bottom Layer w0.3: 33.909,64.801 ccw(c33.909,66.421) 33.909,68.041
  other v1: 30.941,48.158 31.661,48.158 32.381,48.158 33.101,48.158 33.821,48.158 34.541,48.158 31.301,48.878 32.021,48.878 32.741,48.878 33.461,48.878 34.181,48.878 34.901,48.878 38.141,52.478 38.861,52.478 37.9,53.198 38.501,53.198 39.221,53.198 38.141,53.918 38.861,53.918 37.781,54.638 38.501,54.638 36.701,55.358 37.421,55.358 38.141,55.358
NetR9_2: R9.2 U2.8 | length 21.6
  Top Layer w0.25: R9.2@32.87,46.603 v1@32.87,47.336 ; U2.8@36.31,52.566 36.31,53.945
  Layer 2 w0.25: v1(32.882,47.349) 31.683,46.15 29.149,46.15 28.443,46.855 28.443,53.296 30.296,55.148 33.455,55.148 33.909,55.602 33.909,57.031
NetR11_2: R11.2 U2.3 | length 16.4
  Top Layer w0.25: R11.2@29.149,46.625 29.035,46.738 29.073,46.738 29.184,46.85 29.225,46.85 v1(29.225,47.363) v1@29.292,47.43 ; 35.202,49.501 U2.3@35.202,50.431
  Layer 2 w0.25: v1@29.292,47.43 29.292,53.65 30.441,54.798 37.019,54.798
NetR13_1: R13.1 U1.4 U4.2 | length 22.1
  Top Layer w0.25: v1(30.562,40.992) 31.795,40.992 31.945,40.842 U1.4@32.87,40.842
  Bottom Layer w0.25: v1(30.562,40.992) 29.135,40.992 28.067,42.059 28.067,47.915 32.178,52.026 33,52.026 34.175,53.201 35.012,53.201 U4.2@35.02,53.193 35.035,53.179 36.811,53.179 R13.1@36.825,53.164
NetU1_18: U1.18 U2.12 | length 24
  Top Layer w0.25: v1(33.45,53.218) 33.458,53.209 34.167,53.209 U2.12@34.175,53.201 ; U1.18@38.643,40.829 v1@39.377,40.829
  Layer 1 w0.15: v1(33.45,53.218) 33.445,53.218 28.136,47.909 28.136,46.993 30.676,44.453 30.676,43.873 33.732,40.817 v1(39.389,40.817)
NetU1_19: U1.19 U2.11 | length 29.9
  Top Layer w0.25: v1(34.451,53.896) 34.451,53.801 34.65,53.602 34.65,53.176 U2.11@34.675,53.151 ; U1.19@38.643,41.479 38.655,41.49 39.822,41.49 v1(39.823,41.489)
  Layer 1 w0.15: v1(34.451,53.896) 33.262,53.896 32.8,53.434 32.8,52.927 27.886,48.013 27.886,46.889 30.195,44.579 30.195,43.327 33.818,39.704 39.457,39.704 40.132,40.379 40.132,41.058 39.823,41.367 v1(39.823,41.489)
NetU1_20: U1.20 U2.16 | length 22.7
  Top Layer w0.25: v1(32.764,50.438) 32.764,50.455 33.375,51.066 U2.16@33.54,51.066 ; U1.20@38.643,42.129 v1@39.377,42.129
  Layer 1 w0.15: v1(32.764,50.438) 31.371,50.438 28.636,47.702 28.636,47.2 32.274,43.561 37.579,43.561 37.829,43.311 40.001,43.311 40.314,42.998 40.314,42.298 40.132,42.117 v1(39.389,42.117)
NetU1_21: U1.21 U2.15 | length 21.8
  Top Layer w0.25: v1(32.884,51.499) 32.926,51.541 33.565,51.541 U2.15@33.577,51.553 ; U1.21@38.655,42.792 U1.21@38.681,42.792 v1@39.822,42.792
  Layer 1 w0.15: v1(32.884,51.499) 32.08,51.499 28.567,47.987 28.386,47.806 28.386,47.096 28.567,46.915 32.171,43.311 37.113,43.311 37.633,42.79 v1(39.823,42.79)
NetU1_22: U1.22 U2.2 | length 19
  Top Layer w0.25: v1(34.65,49.722) 34.662,49.735 34.662,50.468 U2.2@34.675,50.481 ; U1.22@37.631,43.842 37.631,43.849 37.654,43.872 38.315,43.872 v1(38.346,43.902)
  Layer 1 w0.15: v1(34.65,49.722) 34.131,50.241 33.537,50.241 33.063,49.767 31.13,49.767 29.767,48.404 29.767,46.422 32.36,43.829 38.273,43.829 v1(38.346,43.902)
NetU1_23: U1.23 U2.1 | length 15.6
  Top Layer w0.25: v1(33.738,49.726) 33.805,49.793 33.805,49.896 34.175,50.266 U2.1@34.175,50.431 ; U1.23@36.981,43.804 36.991,43.814 36.991,44.492 v1(37.035,44.537)
  Layer 1 w0.15: v1(33.738,49.726) 33.692,49.726 33.426,49.459 31.176,49.459 30.017,48.3 30.017,46.526 31.134,45.409 36.285,45.409 37.035,44.658 v1(37.035,44.537)
VCC: C1.2 C8.2 C9.2 L1.1 Q1.2 R5.2 R6.2 U2.6 | length 44.1
  Top Layer w0.25: v1(30.308,52.451) R6.2@31.067,52.451 ; v1(30.366,51.285) R5.2@31.074,51.285 ; C1.2@32.341,27.127 32.891,26.577 C1.2@33.016,26.577 C1.2@33.291,26.302 ; U2.6@36.31,51.566 37.576,51.566 37.826,51.316 C8.2@37.846,51.316 C9.2@37.846,49.949
  Layer 1 w0.25: v1(30.366,51.285) 30.337,51.314 30.337,52.422 v1(30.308,52.451) 30.308,52.515 32.26,54.466 35.57,54.466 36.5,53.536 36.5,51.566
  Layer 2 w0.25: v1(36.621,50.258) 36.621,50.791
  Bottom Layer w1: 31.462,27.891 31.462,43.97 33.502,46.01 38.636,46.01 39.269,46.643 v1(39.269,48.158) ; v1@39.221,48.158 39.221,48.858 39.221,48.885
  other v1: 29.621,23.658 30.321,23.658 31.021,23.658 29.971,24.358 30.671,24.358 29.621,25.058 30.321,25.058 31.021,25.058 36.621,25.058 37.321,25.058 29.971,25.758 30.671,25.758 30.321,26.458 31.021,26.458 35.221,26.458 35.921,26.458 30.671,27.158 36.971,27.158 38.371,27.158 30.321,27.858 36.971,48.158 37.671,48.158 38.371,48.158 36.621,48.858 37.321,48.858 38.021,48.858 38.721,48.858 36.971,49.558
pads on no net: U1.2 U1.3 U1.9 U1.13 U1.14 U1.15 U2.5
copper on no net: | length 6.6
  Top Layer w0.1: 34.959,66.421 ccw(c33.909,66.421) 34.959,66.421

## Polygon pours and split planes (outlines as drawn)
GND on Top Layer "GND_L01_P005" (solid, pour order 5): 30.017,58.08 37.801,58.08 40.693,53.17 40.894,17.399 27.051,17.399 27.178,53.213
+3.3V on Top Layer "+3.3V_L01_P009" (solid, remove dead copper, pour order 9): 34.15,38.764 34.15,34.553 32.725,34.553 32.049,34.553 32.049,33.764 32.049,31.843 36.214,31.843 36.214,34.935 36.214,37.077 35.416,38.156 35.416,38.764
+3.3V on Top Layer "+3.3V_L01_P024" (solid, pour order 24): 35.411,43.311 36.331,43.311 36.331,44.086 36.28,44.137 39.281,44.137 39.281,46.135 39.31,46.164 35.871,46.164 35.501,45.064 35.383,44.777
GND on Top Layer "GND_L01_P017" (solid, pour order 17): 35.322,50.956 36.181,50.956 36.181,47.749 40.682,47.749 40.682,45.864 28.599,45.864 28.599,47.846 35.322,47.846
NetR7_2 on Top Layer "NETR7_2_L01_P016" (solid, pour order 16): 34.802,50.981 35.322,50.956 35.318,47.846 30.513,47.846 30.513,49.467 34.311,49.467
VCC on Top Layer "VCC_L01_P018" (solid, pour order 18): 34.731,28.964 35.092,28.964 35.092,27.695 39.815,27.695 39.815,24.197 38.181,24.197 36.052,24.197 32.367,24.197 32.367,22.706 28.833,22.706 28.833,27.783 31.532,28.964
VCC on Top Layer "VCC_L01_P014" (solid, pour order 14): 36.181,51.879 36.181,47.4 39.92,47.4 39.92,51.616 38.053,51.616
NetH1_2 on Top Layer "NETH1_2_L01_P006" (solid, pour order 6): 33.934,25.852 35.238,25.852 36.052,25.852 36.052,24.197 36.275,23.974 36.225,23.924 35.295,23.924 35.295,19.651 32.369,19.651 32.369,22.64 32.81,23.081
NetR7_2 on Top Layer "NETR7_2_L01_P015" (solid, pour order 15): 35.18,56.035 37.003,54.212 37.003,52.667 37.003,51.616 38.053,51.616 39.92,51.616 39.92,53.201 38.182,56.035
NetC2_2 on Top Layer "NETC2_2_L01_P007" (solid, pour order 7): 37.142,33.869 39.481,33.869 39.481,28.532 39.584,28.429 39.319,28.164 35.254,28.164 34.65,28.164 34.499,28.919 33.399,28.919 33.399,30.019 35.192,31.812 35.192,32.012 37.142,31.932 37.142,32.989
NetR9_2 on Top Layer "NETR9_2_L01_P004" (solid, pour order 4): 32.55,56.035 32.55,54.83 34.823,54.83 35.594,54.06 35.594,52.197 35.615,52.176 37.05,52.176 37.05,54.164 35.18,56.035
NetR11_2 on Top Layer "NETR11_2_L01_P003" (solid, pour order 3): 30.546,56.035 32.55,56.035 32.55,54.989 32.708,54.83 34.823,54.83 35.594,54.06 35.594,53.391 34.65,53.391 34.451,53.59 34.451,53.896 30.546,53.896
GND on Layer 1 "GND_L02_P021" (solid, pour order 21): 30.017,58.08 37.801,58.08 40.693,53.17 40.894,17.399 27.051,17.399 27.178,53.213
VCC on Layer 1 "VCC_L02_P012" (solid, pour order 12): 36.181,51.879 36.181,47.4 39.458,47.4 39.458,51.616 38.053,51.616
GND on Layer 1 "GND_L02_P013" (solid, pour order 13): 35.322,50.956 36.181,50.956 36.181,47.749 38.985,47.749 38.985,46.332 30.099,46.332 30.099,47.846 35.322,47.846
GND on Layer 2 "GND_L03_P020" (solid, pour order 20): 30.07,58.08 38.003,58.08 40.82,53.297 41.021,17.526 27.178,17.526 27.305,53.34
VCC on Layer 2 "VCC_L03_P023" (solid, pour order 23): 36.181,51.879 36.181,47.4 39.458,47.4 39.458,51.616 38.053,51.616
NetR7_2 on Layer 2 "NETR7_2_L03_P011" (solid, pour order 11): 36.433,55.152 36.917,51.693 36.282,51.4 36.282,47.846 30.513,47.846 30.513,49.467 30.513,55.051
NetR7_2 on Layer 2 "NETR7_2_L03_P010" (solid, pour order 10): 35.18,56.035 36.31,54.904 36.31,51.616 38.053,51.616 39.644,51.616 39.671,53.333 38.184,56.035
GND on Bottom Layer "GND_L04_P022" (solid, pour order 22): 30.017,58.08 37.801,58.08 40.693,53.17 40.894,17.399 27.051,17.399 27.178,53.213
+3.3V on Bottom Layer "+3.3V_L04_P027" (solid, pour order 27): 35.986,42.492 39.481,42.492 39.481,45.751 35.986,45.833
+3.3V on Bottom Layer "+3.3V_L04_P025" (solid, pour order 25): 34.381,36.753 36.691,36.753 36.691,33.869 34.337,33.88
VCC on Bottom Layer "VCC_L04_P008" (solid, pour order 8): 28.959,30.519 31.912,31.236 35.092,28.056 39.815,28.056 39.815,22.647 28.959,22.647
VCC on Bottom Layer "VCC_L04_P019" (solid, pour order 19): 36.181,51.879 36.181,47.4 39.751,47.4 39.751,51.616 38.053,51.616

## Keep-outs
Keep-Out Layer:
  lines w0.1: 29.491,60.369 cw(c30.184,59.969) 30.984,59.969 cw(c30.184,59.969) 30.877,59.569 27.136,53.09 27.136,17.475 40.682,17.475 40.682,53.09 36.941,59.569 ; 29.491,60.369 29.261,59.972 cw(c33.909,66.421) 28.833,60.303 cw(c33.909,66.421) 26,65.621 26.459,65.621 ccw(c26.459,66.421) 27.259,66.421 ccw(c26.459,66.421) 26.459,67.221 26,67.221 cw(c33.909,66.421) 29.261,72.87 29.491,72.473 ; 29.491,60.369 29.491,60.369 ; 29.491,72.473 ccw(c30.184,72.873) 30.984,72.873 ccw(c30.184,72.873) 30.877,73.273 ; 29.491,72.473 29.491,72.473 ; 30.877,73.273 30.648,73.671 cw(c33.909,66.421) 37.17,73.671 36.922,73.241 ; 30.877,73.273 30.877,73.273 ; 36.917,73.229 ccw(c37.634,72.873) 38.282,72.403 ; 36.917,73.229 cw(c36.966,73.215) 36.922,73.241 ; 36.917,73.229 36.917,73.229 ; 36.922,73.241 36.922,73.241 ; 36.941,59.569 cw(c37.634,59.969) 38.327,60.369 ; 36.941,59.569 36.941,59.569 ; 38.282,72.403 ccw(c38.252,72.444) 38.296,72.419 38.557,72.87 cw(c33.909,66.421) 41.818,67.221 41.359,67.221 ccw(c41.359,66.421) 41.359,65.621 41.818,65.621 cw(c33.909,66.421) 38.985,60.303 cw(c33.909,66.421) 38.557,59.972 38.327,60.369 ; 38.282,72.403 38.282,72.403 ; 38.327,60.369 38.327,60.369

## Silkscreen, mask and mechanical layers (free items; w line width, h text height)
Top Overlay:
  drawing of 11 lines, arcs and shapes, not listed
  text "v4" at 35.698,61.68 h1.3
  text "PCBMotor" at 31.343,60.003 h1.2
  text "+" at 33.459,18.458 h1.2
  text "-" at 36.015,18.412 h1.2
  text "S" at 30.961,18.341 h1.2
Bottom Overlay:
  lines w0.35: 30.985,58.975 ccw(c33.909,66.421) 36.92,59.009
  text "Designed by Carl Bugeja" at 39.216,17.907 h1.52 r270
Mechanical 1:
  lines w0.1: 28.801,60.264 cw(c33.909,66.421) 25.944,65.671 ; 36.966,73.215 37.242,73.694 ccw(c33.909,66.421) 30.576,73.694 30.834,73.248 cw(c30.184,72.873) 29.534,72.498 29.277,72.944 ccw(c33.909,66.421) 25.944,67.171 26.459,67.171 cw(c26.459,66.421) 26.459,65.671 ; 36.984,73.248 ccw(c37.634,72.873) 38.284,72.498 ; 38.252,72.444 38.541,72.944 cw(c33.909,66.421) 41.874,67.171 41.359,67.171 ccw(c41.359,66.421) 41.359,65.671 ; 39.017,60.264 ccw(c33.909,66.421) 41.874,65.671 ; 25.944,65.671 ccw(c33.909,66.421) 29.277,59.898 29.534,60.344 cw(c30.184,59.969) 30.834,59.594 27.086,53.103 27.086,17.424 40.732,17.424 40.732,53.103 36.984,59.594 cw(c37.634,59.969) 38.284,60.344 38.541,59.898 ccw(c33.909,66.421) 41.874,65.671 ; 25.944,65.671 26.459,65.671 ; 25.944,65.671 26.459,65.671 ; 41.359,65.671 41.874,65.671 ; 41.359,65.671 41.874,65.671
Mechanical 2:
  lines w0.254: 22.737,102.787 40.009,102.787 ; 21.594,87.166 48.899,87.166 48.899,106.343 21.594,106.343 21.594,87.166
  text "PCBMotorv4 Specs: / -IPC 6012 Class 3 / -Tg170 FR4 / -0.6mm thickness / -4/4mil Min Track/Spacing / -0.2mm Min Hole Size / -1oz Finished Copper / -1oz Inner Copper" at 22.61,88.817 h1

## Text inside footprints (layer, text, board x,y; h text height)
L1: Mechanical 6 "Land Pattern Adapted for Reflow Soldering" at 33.299,27.919 h0.05 r90